# EAGLE board App__JehanSagadevan (EAGLE 5.11)
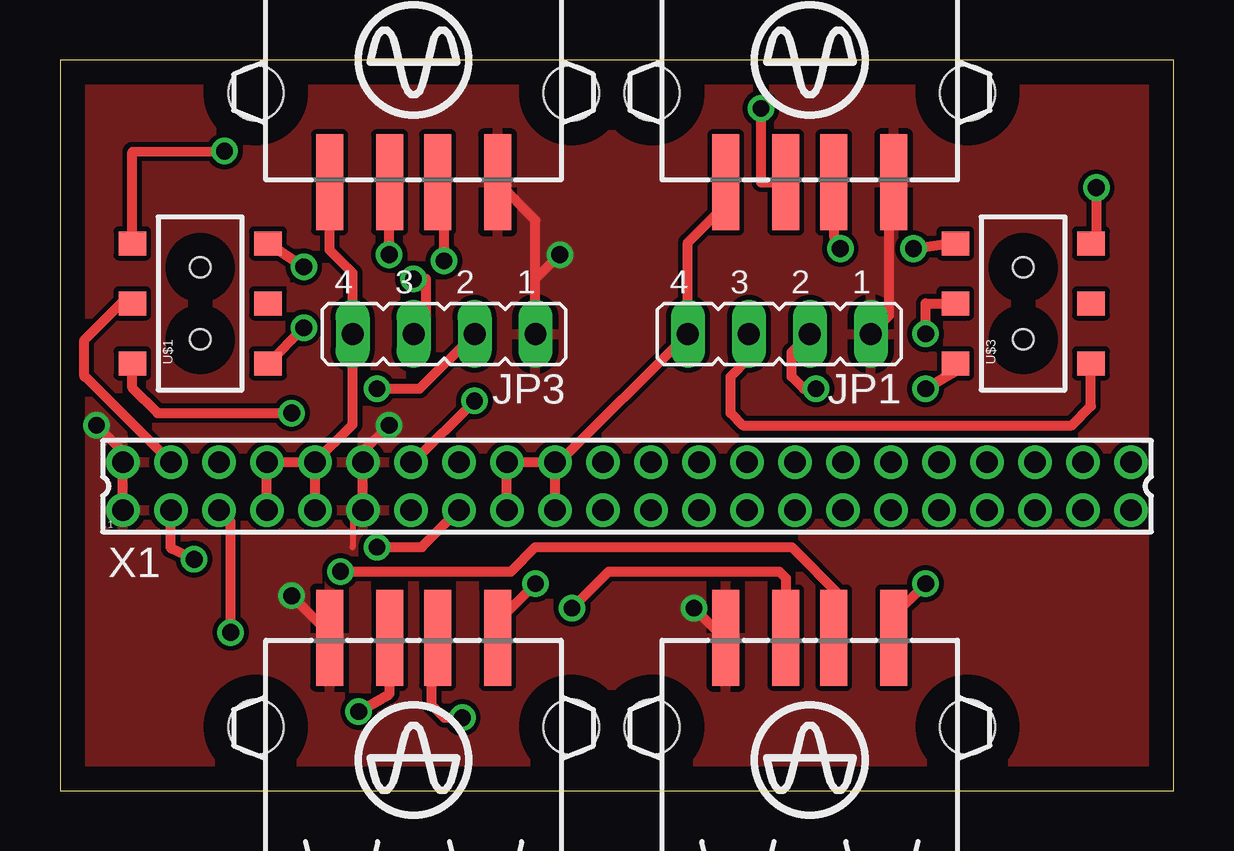
[diagram p0: board, top side]
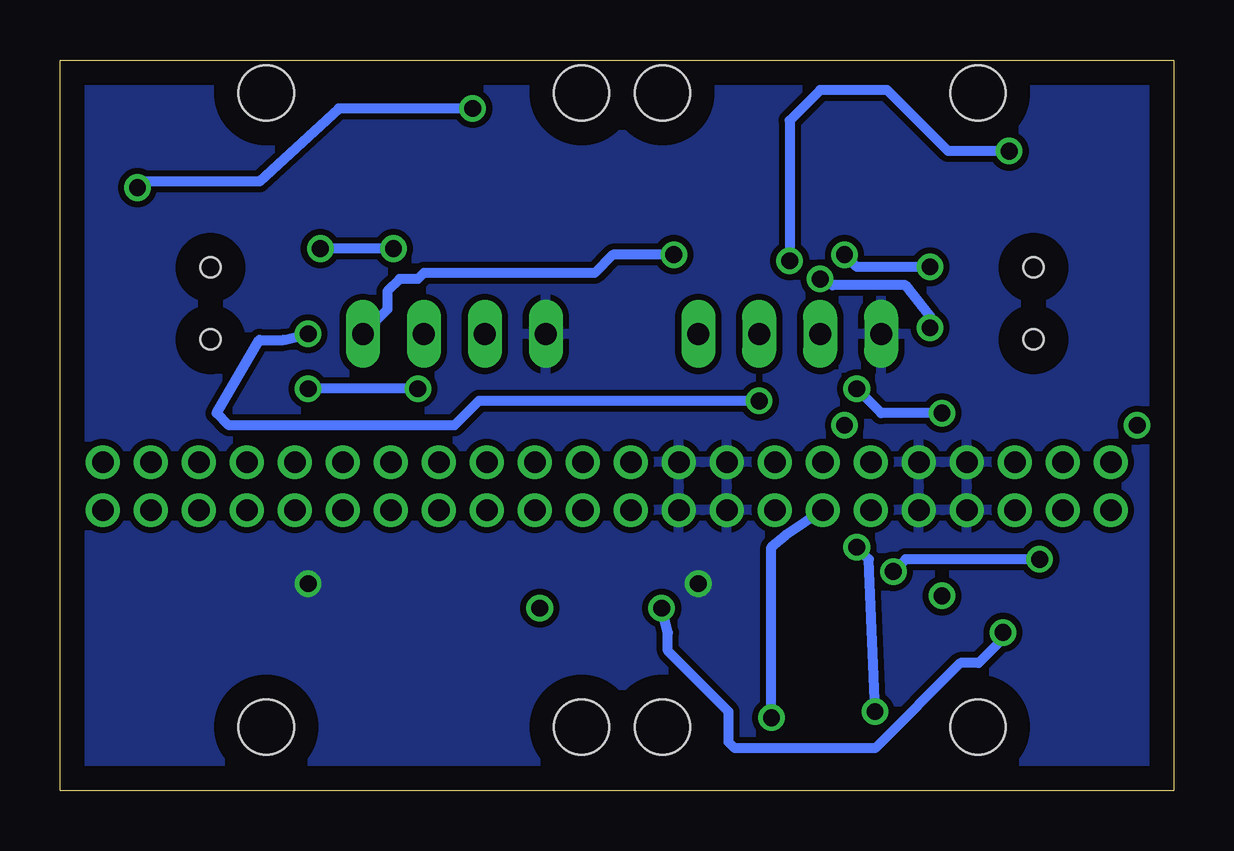
[diagram p1: board, bottom side, seen from below]

Size 46.41 x 30.47 mm. Coordinates in mm from the lower left corner, seen from the top.
Outline: 0,0 46.41,0 46.41,30.47 0,30.47 0,0
Copper layers (1*16): Top 0.035mm / dielectric 1.5mm / Bottom 0.035mm
Design rules "default": minimum track width 10mil, minimum drill 24mil, track to track 8mil, track to pad 8mil, pad to pad 8mil, via to via 8mil, smd to smd 8mil, copper to edge 40mil, drill to drill 8mil, minimum pad ring 10mil, minimum via ring 8mil, stop-mask expansion 4mil, vias tented up to drill 0mil, thermal gap 10mil

## Footprints (pad centres in the part's own frame; a part is rotated, then mirrored left to right if it is on the bottom)
JP4 = drill 0.914 long: 1 -3.81,0; 2 -1.27,0; 3 1.27,0; 4 3.81,0
AYZ0202 = smd 1 x 1.15: 1 -2.5,2.825; 2 0,2.825; 3 2.5,2.825; 4 -2.5,-2.825; 5 0,-2.825; 6 2.5,-2.825 | hole 0.85: 1.5,0; -1.5,0
87758-4416 = drill 0.9 pad 1.27 round: 1 -21,-1; 2 -21,1; 3 -19,-1; 4 -19,1; 5 -17,-1; 6 -17,1; 7 -15,-1; 8 -15,1; 9 -13,-1; 10 -13,1; 11 -11,-1; 12 -11,1; 13 -9,-1; 14 -9,1; 15 -7,-1; 16 -7,1; 17 -5,-1; 18 -5,1; 19 -3,-1; 20 -3,1; 21 -1,-1; 22 -1,1; 23 1,-1; 24 1,1; 25 3,-1; 26 3,1; 27 5,-1; 28 5,1; 29 7,-1; 30 7,1; 31 9,-1; 32 9,1; 33 11,-1; 34 11,1; 35 13,-1; 36 13,1; 37 15,-1; 38 15,1; 39 17,-1; 40 17,1; 41 19,-1; 42 19,1; 43 21,-1; 44 21,1
USB-A003 = smd 1.12 x 4: 1 -3.5,14; 2 -1,14; 3 1,14; 4 3.5,14 | hole 2.3: -6.57,10.28; 6.57,10.28

## Placement (x,y rotation side)
JP1  [JP4]  29.97,19.05 180 top
JP3  [JP4]  16,19.05 180 top
U$1  AYZ0202  [AYZ0202]  5.84,20.32 90 top
U$3  AYZ0202  [AYZ0202]  40.13,20.32 90 top
X1  87758-4416  [87758-4416]  23.62,12.7 0 top
X2  [USB-A003]  14.73,39.37 180 top
X3  [USB-A003]  31.24,-7.62 0 top
X4  [USB-A003]  14.73,-7.62 0 top
X6  [USB-A003]  31.24,39.37 180 top

## Library data of the parts
JP1 JP3 = jumper
U$1 U$3 = SparkFun
X1 = con-molex; MF: MOLEX; MPN: 87758-4416; OC_FARNELL: unknown; OC_NEWARK: 59J1588
X2-X4 X6 = con-yamaichi; OC_FARNELL: unknown; OC_NEWARK: unknown

## Nets
DN1: X1.5 X3.2
DN2: X1.15 X4.2
DN3: X1.6
DN4: X1.16
DP1: X1.3 X3.3
DP2: X1.13 X4.3
DP3: U$1.2 X1.4
DP4: U$3.2 X1.14
GND: JP1.4 JP3.4 X1.7 X1.8 X1.9 X1.10 X1.17 X1.18 X1.19 X1.20 X2.4 X3.4 X4.4 X6.4
N$1: JP3.2 U$1.1
N$2: U$1.3 X2.2
N$3: JP3.3 U$1.4
N$6: JP1.3 U$3.4
N$13: U$1.6 X2.3
N$21: JP1.2 U$3.1
N$22: U$3.3 X6.2
N$24: U$3.6 X6.3
VDD: JP1.1 JP3.1 X1.1 X1.2 X1.11 X1.12 X2.1 X3.1 X4.1 X6.1

## Tracks (layer width: path | path; a pad name or v marks a point on that pad's centre or on a via)
DN1  (via drill 0.7)
  Top 0.406: X3.2 30.24,8.87 29.97,9.14 22.86,9.14 v21.34,7.62 | v7.11,6.6 7.11,11.21 X1.5
  Bottom 0.406: v21.34,7.62 21.08,6.6 21.08,5.84 18.54,3.3 18.54,2.03 18.29,1.78 12.45,1.78 8.89,5.33 8.13,5.33 7.11,6.35 v7.11,6.6
DN2  (via drill 0.7)
  Top 0.406: X4.2 13.73,4.05 v12.45,3.3 | v13.21,10.16 15.08,10.16 X1.15
  Bottom 0.406: v12.45,3.3 12.7,9.65 v13.21,10.16
DP1  (via drill 0.7)
  Top 0.406: X1.3 4.62,10.11 v5.59,9.65 | v11.68,9.14 18.8,9.14 19.81,10.16 30.48,10.16 32.51,8.13 32.51,6.65 X3.3
  Bottom 0.406: v5.59,9.65 11.18,9.65 v11.68,9.14
DP2  (via drill 0.7)
  Top 0.406: 15.48,6.33 X4.3 15.49,6.14 15.49,3.56 16,3.05 v16.76,3.05
  Bottom 0.406: v16.76,3.05 16.76,10.16 16.16,10.67 X1.13
DP3
  Top 0.406: U$1.2 2.54,20.32 1.02,18.8 1.02,17.27 1.05,17.27 X1.4
DP4  (via drill 0.7)
  Top 0.406: X1.14 14.72,13.7 v17.27,16.26 | v36.07,19.05 36.07,20.32 U$3.2
  Bottom 0.406: v17.27,16.26 28.96,16.26 29.97,15.24 39.37,15.24 39.88,15.75 38.1,18.8 37.08,18.8 v36.07,19.05
GND  (via drill 0.7)
  Top 0.406: X1.10 X1.8 X1.7 | X2.4 11.23,22.55 12.19,21.59 JP3.4 12.19,15.27 X1.10 | X6.4 27.74,24.44 26.16,22.86 JP1.4 20.81,13.7 X1.20 | X4.4 18.23,7.06 v19.81,8.64 | X1.10 X1.9 | X1.17 X1.18 X1.20 | X1.20 X1.19 | X3.4 34.74,7.31 v36.07,8.64
  pour Bottom (isolate 0.254): 0.51,29.97 45.72,29.97 45.72,0.51 0.51,0.51 0.51,28.96
N$1  (via drill 0.7)
  Top 0.406: U$1.1 3.02,16.8 4.06,15.75 v9.65,15.75 | v13.21,16.76 14.99,16.76 JP3.2
  Bottom 0.406: v9.65,15.75 12.19,15.75 v13.21,16.76
N$2  (via drill 0.7)
  Top 0.406: U$1.3 3.02,26.64 v6.86,26.67 | v16,22.1 16,25.1 X2.2
  Bottom 0.406: v16,22.1 16,27.94 14.73,29.21 11.94,29.21 9.4,26.67 v6.86,26.67
N$3  (via drill 0.7)
  Top 0.406: U$1.4 v10.16,19.3 | v14.73,21.34 15.24,21.34 15.24,19.56 JP3.3
  Bottom 0.406: v10.16,19.3 10.16,19.81 11.18,21.08 14.22,21.08 v14.73,21.34
N$6
  Top 0.406: JP1.3 28.7,18.03 27.94,17.27 27.94,15.75 28.45,15.24 42.16,15.24 42.96,16.03 U$3.4
N$13  (via drill 0.7)
  Top 0.406: U$1.6 v10.16,21.84 | v13.72,22.35 13.72,25.35 X2.3
  Bottom 0.406: v10.16,21.84 13.21,21.84 v13.72,22.35
N$21  (via drill 0.7)
  Top 0.406: U$3.1 37.31,17.5 v36.07,16.76 | v31.5,16.76 30.99,16.76 30.48,17.27 30.48,18.29 JP1.2
  Bottom 0.406: v31.5,16.76 v36.07,16.76
N$22  (via drill 0.7)
  Top 0.406: X6.2 32.24,23.13 v32.51,22.61 | v35.56,22.61 37.27,22.86 U$3.3
  Bottom 0.406: v32.51,22.61 v35.56,22.61
N$24  (via drill 0.7)
  Top 0.406: X6.3 29.21,25.37 v29.21,28.45 | v43.18,25.15 43.18,23.04 U$3.6
  Bottom 0.406: v29.21,28.45 34.8,28.45 38.1,25.4 42.93,25.4 v43.18,25.15
VDD  (via drill 0.7)
  Top 0.254: 12.19,10.16 12.19,11.43 X1.11
  Top 0.406: X1.1 X1.2 2.62,14.14 v1.52,15.24 | X2.1 19.81,23.79 JP3.1 19.81,21.34 v20.83,22.35 | X6.1 34.74,24.58 34.54,24.38 34.54,19.81 JP1.1 | v13.72,15.24 12.62,14.15 X1.12 X1.11 12.68,11.7 12.7,11.68 | X4.1 11.23,6.55 v9.65,8.13 | X3.1 27.66,6.38 v26.42,7.62
  Bottom 0.406: v20.83,22.35 23.37,22.35 24.13,21.59 31.24,21.59 31.5,21.34 32.26,21.34 32.77,20.83 32.77,20.07 JP1.1
  pour Top: 1.02,30.48 46.23,30.48 46.23,0 0.51,0 0.51,5.08